# EAGLE board ME433 (EAGLE 8.7.1)
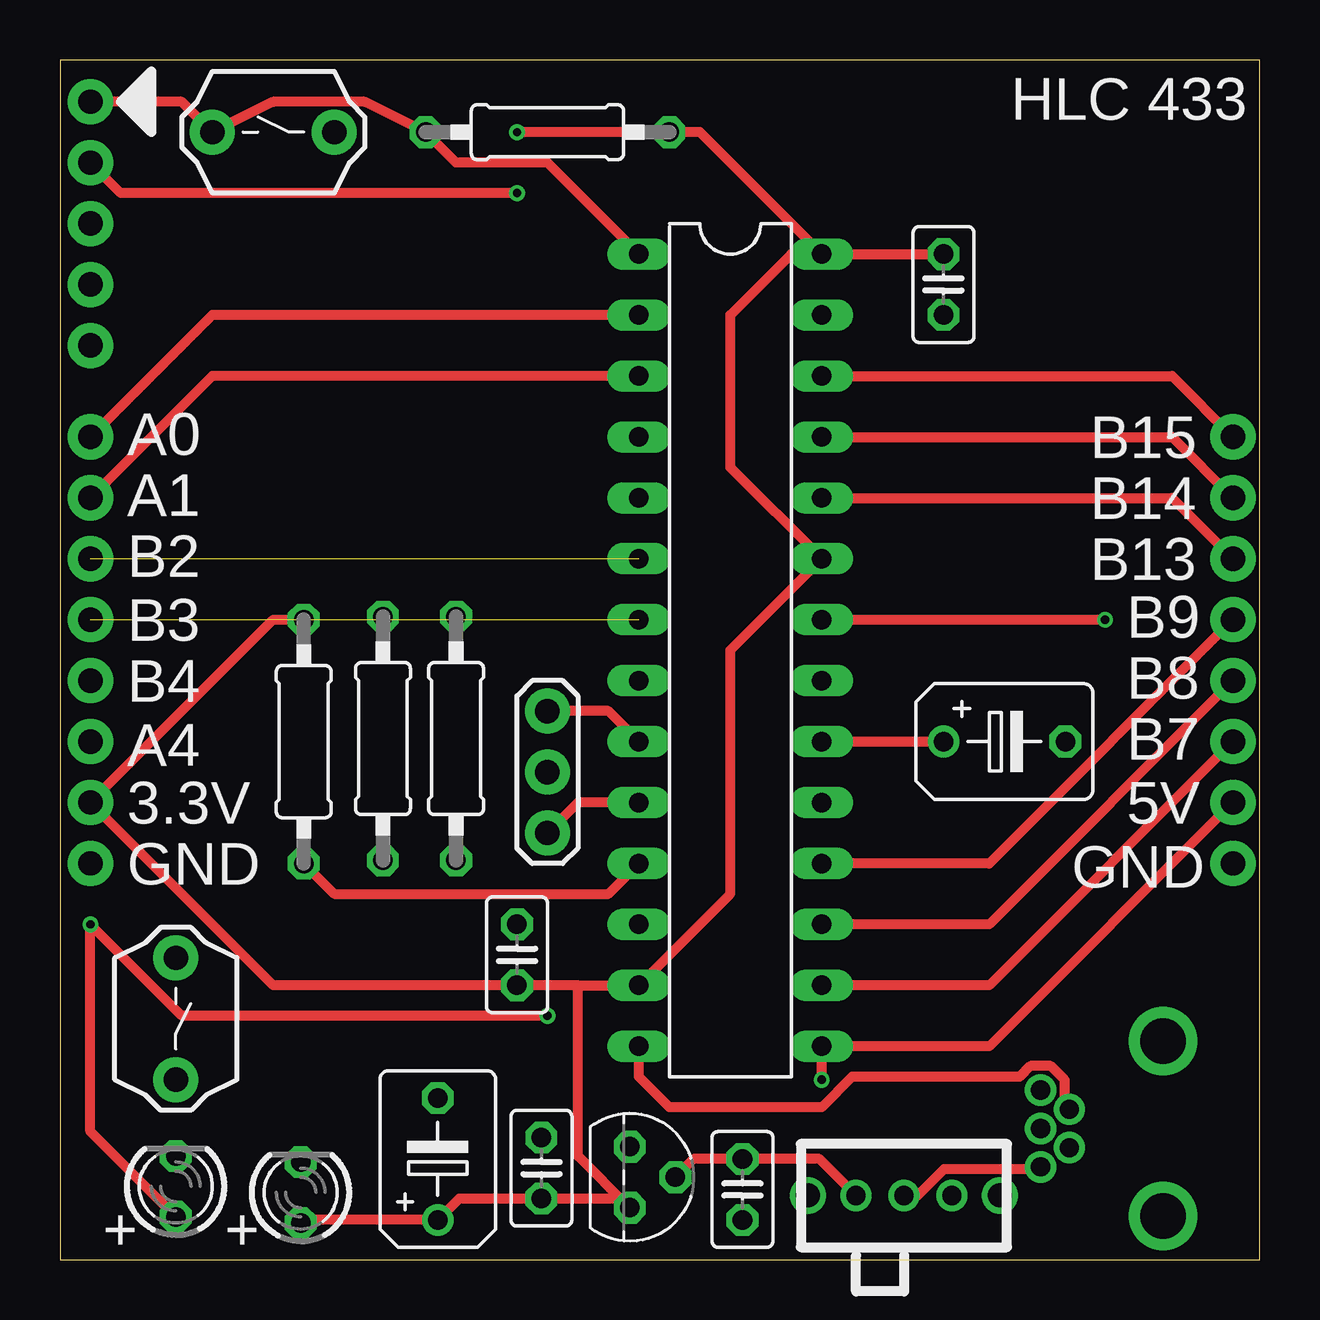
[diagram p0: board, top side]
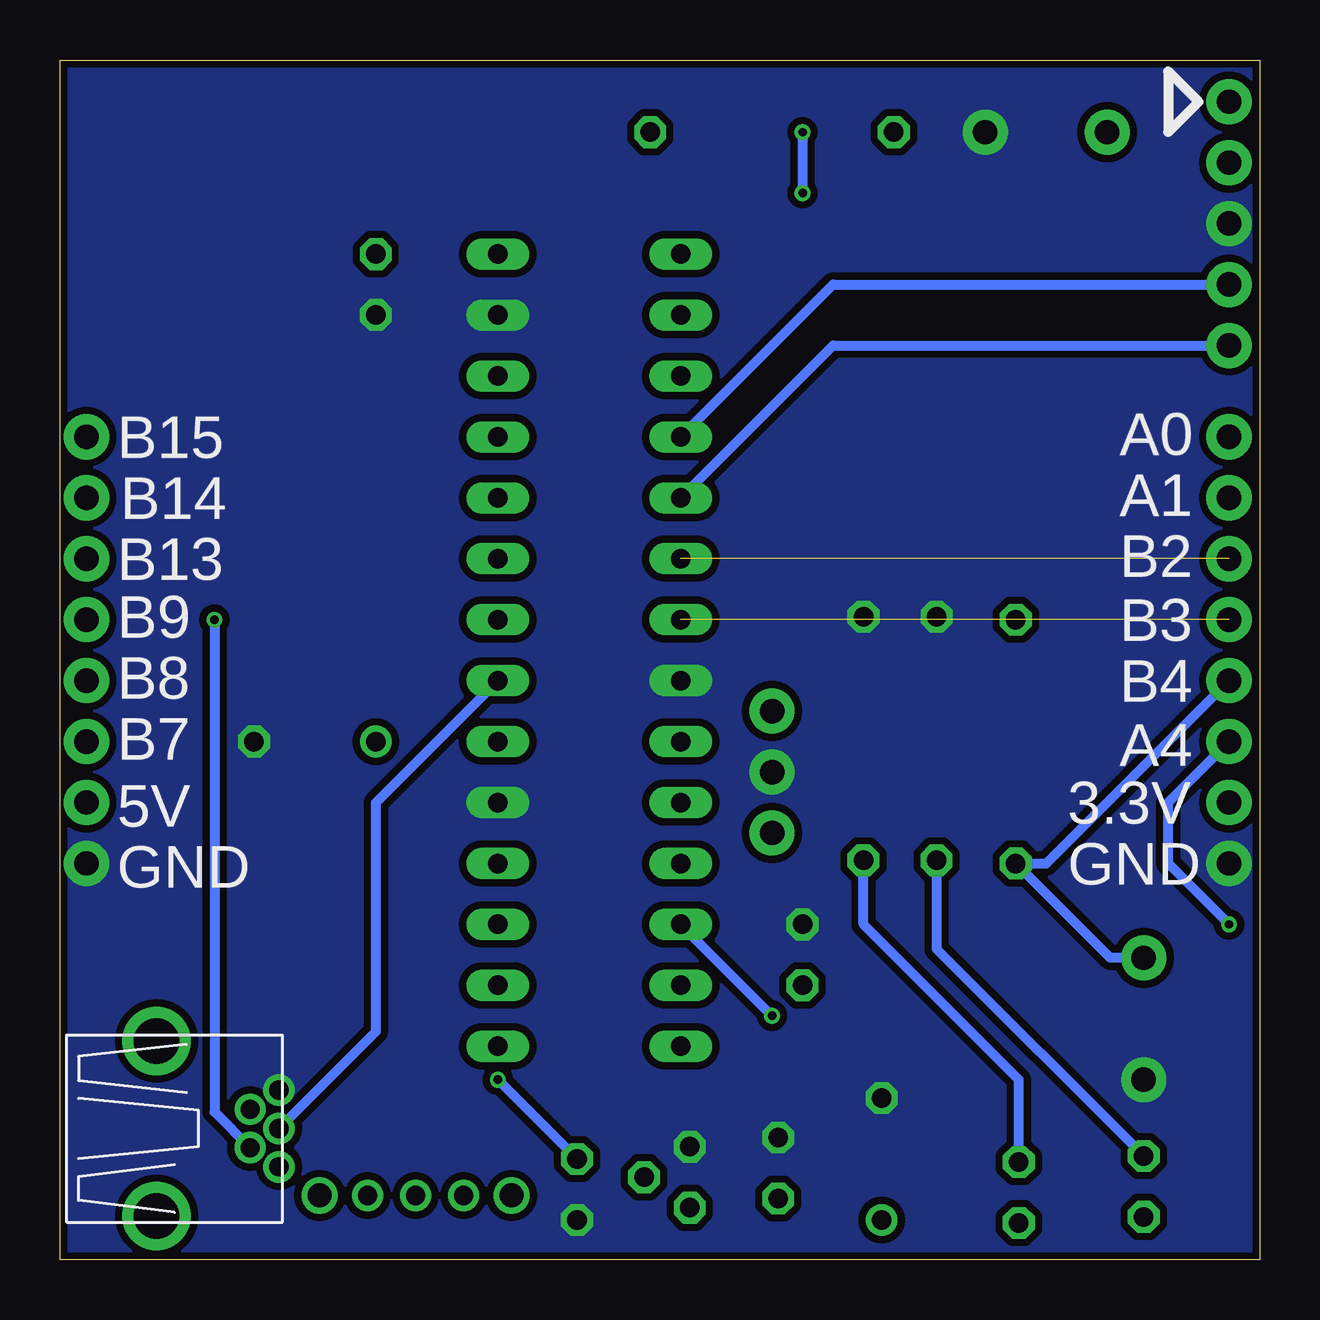
[diagram p1: board, bottom side, seen from below]

Size 50 x 50 mm. Coordinates in mm from the lower left corner, seen from the top.
Outline: 0,0 50,0 50,50 0,50 0,0
Copper layers (1*16): Top 0.035mm / dielectric 1.5mm / Bottom 0.035mm
Design rules "SeeedStudio_2layer_DRU_no_angle_20140221": minimum track width 6mil, minimum drill 12mil, track to track 6mil, track to pad 6mil, pad to pad 6mil, via to via 6mil, smd to smd 0mil, copper to edge 10mil, drill to drill 10mil, minimum pad ring 10mil, minimum via ring 6mil, stop-mask expansion 2mil, vias tented up to drill 100mil, thermal gap 10mil

## Footprints (pad centres in the part's own frame; a part is rotated, then mirrored left to right if it is on the bottom)
C025-025X050 = drill 0.813 octagon: 1 -1.27,0; 2 1.27,0
B45181B = drill 0.813: + -2.54,0 | drill 0.813 octagon: - 2.54,0
USB-MB-H = drill 0.8: D+ 5.1,0; D- 3.9,0.8; GND 5.1,-1.6; ID 3.9,-0.8; VBUS 5.1,1.6 | drill 1.9: P$6 0,-3.65; P$7 0,3.65
LED3MM = drill 0.813 octagon: A -1.27,0; K 1.27,0
0207/10 = drill 0.813 octagon: 1 -5.08,0; 2 5.08,0
DIL28-3 = drill 0.813 long: 1 -16.51,-3.81; 2 -13.97,-3.81; 3 -11.43,-3.81; 4 -8.89,-3.81; 5 -6.35,-3.81; 6 -3.81,-3.81; 7 -1.27,-3.81; 8 1.27,-3.81; 9 3.81,-3.81; 10 6.35,-3.81; 11 8.89,-3.81; 12 11.43,-3.81; 13 13.97,-3.81; 14 16.51,-3.81; 15 16.51,3.81; 16 13.97,3.81; 17 11.43,3.81; 18 8.89,3.81; 19 6.35,3.81; 20 3.81,3.81; 21 1.27,3.81; 22 -1.27,3.81; 23 -3.81,3.81; 24 -6.35,3.81; 25 -8.89,3.81; 26 -11.43,3.81; 27 -13.97,3.81; 28 -16.51,3.81
SLIDE = drill 0.8: 1 -2,0; 2 0,0; 3 2,0 | drill 1: P$1 -4,0; P$2 4,0
TO92 = drill 0.813 octagon: 1 -1.27,0; 2 0,1.905; 3 1.27,0
PB = drill 1.016 pad 1.88: 1 -2.54,0; 2 2.54,0
1X08 = drill 1.016 pad 1.88: 1 0,0; 2 2.54,0; 3 5.08,0; 4 7.62,0; 5 10.16,0; 6 12.7,0; 7 15.24,0; 8 17.78,0
1X05 = drill 1.016 pad 1.88: 1 0,0; 2 2.54,0; 3 5.08,0; 4 7.62,0; 5 10.16,0
OSC = drill 1.016 pad 1.88: 1 -2.54,0; 2 0,0; 3 2.54,0

## Placement (x,y rotation side)
C1  0.1uF  [C025-025X050]  36.83,40.64 270 top
C2  0.1uF  [C025-025X050]  19.05,12.7 90 top
C3  0.1uF  [C025-025X050]  28.45,2.92 270 top
C6  0.1uF  [C025-025X050]  20.07,3.81 90 top
C7  10uF  [B45181B]  39.37,21.59 0 top
C8  10uF  [B45181B]  15.75,4.19 90 top
J1  USB-MB-H  [USB-MB-H]  45.97,5.46 180 top
LED1  Red  [LED3MM]  10.03,2.79 90 top
LED2  Green  [LED3MM]  4.83,3.05 90 top
R1  330  [0207/10]  16.51,21.72 270 top
R2  330  [0207/10]  13.46,21.72 270 top
R3  10k  [0207/10]  20.32,46.99 180 top
R4  10k  [0207/10]  10.16,21.59 270 top
U$1  PIC32MX250F128B  [DIL28-3]  27.94,25.4 270 top
U$2  SLIDE  [SLIDE]  35.18,2.67 180 top
U$3  MCP1702  [TO92]  23.75,3.43 270 top
U$4  RESET  [PB]  8.89,46.99 0 top
U$5  USER  [PB]  4.83,10.03 270 top
U$6  CONN_08  [1X08]  48.9,16.51 90 top
U$7  CONN_08  [1X08]  1.27,16.51 90 top
U$8  PICKIT3  [1X05]  1.27,48.26 270 top
U$9  8MHz  [OSC]  20.32,20.32 270 top

## Library data of the parts
C1-C3 C6 R1-R4 = resistor
C7 C8 J1 U$1-U$9 = HW2
LED1 LED2 = led

## Nets
+3V3: C1.1 C2.1 C6.1 C8.+ LED1.A R3.1 R4.1 U$1.13 U$1.23 U$1.28 U$3.3 U$7.2 U$8.2
+5V: C3.1 U$1.15 U$2.3 U$3.2 U$6.2
A0: U$1.2 U$7.8
A1: U$1.3 U$7.7
A4/LED: LED2.A U$1.12 U$7.3
B2: U$1.6 U$7.6
B3: U$1.7 U$7.5
B4/USER: R4.2 U$1.11 U$5.1 U$7.4
B7: U$1.16 U$6.3
B8: U$1.17 U$6.4
B9: U$1.18 U$6.5
B13: U$1.24 U$6.6
B14: U$1.25 U$6.7
B15: U$1.26 U$6.8
D+: J1.D+ U$1.21
D-: J1.D- U$1.22
GND: C1.2 C2.2 C3.2 C6.2 C7.- C8.- J1.GND R1.1 R2.1 U$1.8 U$1.19 U$1.27 U$3.1 U$4.2 U$5.2 U$6.1 U$7.1 U$8.3 U$9.2
MCLR: R3.2 U$1.1 U$4.1 U$8.1
N$1: J1.VBUS U$2.2
N$2: U$1.9 U$9.1
N$3: U$1.10 U$9.3
N$4: LED1.K R1.2
N$5: C7.+ U$1.20
N$7: LED2.K R2.2
PGC: U$1.5 U$8.5
PGD: U$1.4 U$8.4
USBID: J1.ID U$1.14

## Tracks (layer width: path | path; a pad name or v marks a point on that pad's centre or on a via)
+3V3  (via drill 0.35)
  Top 0.406: LED1.A 10.16,1.65 C8.+ 16.64,2.54 C6.1 23.37,2.54 U$3.3 21.59,4.32 21.59,11.43 | 21.59,11.43 U$1.13 27.94,15.24 27.94,25.4 U$1.23 27.94,33.02 27.94,39.37 30.48,41.91 U$1.28 | 21.59,11.43 C2.1 8.89,11.43 U$7.2 8.89,26.67 R4.1 | U$1.28 C1.1 | U$1.28 26.67,46.99 R3.1 v19.05,46.99 | U$8.2 2.54,44.45 v19.05,44.45
  Bottom 0.406: v19.05,46.99 v19.05,44.45
+5V  (via drill 0.35)
  Top 0.406: U$2.3 31.66,4.19 C3.1 26.42,4.19 U$3.2 | v31.75,7.49 U$1.15 38.73,8.89 U$6.2
  Bottom 0.406: C3.1 v31.75,7.49
A0
  Top 0.406: U$1.2 6.35,39.37 U$7.8
A1
  Top 0.406: U$1.3 6.35,36.83 U$7.7
A4/LED  (via drill 0.35)
  Top 0.406: LED2.A 1.27,5.33 v1.27,13.97 5.08,10.16 v20.32,10.16
  Bottom 0.406: v1.27,13.97 3.81,16.51 3.81,19.05 U$7.3 | U$1.12 v20.32,10.16
B2  (1 unrouted)
B3  (1 unrouted)
B4/USER
  Top 0.406: R4.2 11.43,15.24 22.86,15.24 U$1.11
  Bottom 0.406: U$7.4 8.89,16.51 R4.2 6.22,12.57 U$5.1
B7
  Top 0.406: U$6.3 38.73,11.43 U$1.16
B8
  Top 0.406: U$6.4 38.73,13.97 U$1.17
B9
  Top 0.406: U$6.5 38.73,16.51 U$1.18
B13
  Top 0.406: U$1.24 46.35,31.75 U$6.6
B14
  Top 0.406: U$1.25 46.35,34.29 U$6.7
B15
  Top 0.406: U$1.26 46.35,36.83 U$6.8
D+
  Bottom 0.406: U$1.21 36.83,19.05 36.83,9.51 J1.D+
D-  (via drill 0.35)
  Top 0.406: U$1.22 v43.56,26.67 43.69,26.67
  Bottom 0.406: v43.56,26.67 43.56,6.15 J1.D-
GND
  pour Bottom (isolate 0.305, no thermals): 0,50.04 50.04,50.04 50.04,0.51 49.53,0 0,0 0,49.53
MCLR
  Top 0.406: U$1.1 20.32,45.72 16.51,45.72 R3.2 12.7,48.26 8.89,48.26 U$4.1 5.08,48.26 U$8.1
N$1
  Top 0.406: U$2.2 35.75,2.67 36.86,3.78 40.79,3.78 J1.VBUS
N$2
  Top 0.406: U$1.9 22.86,22.86 U$9.1
N$3
  Top 0.406: U$1.10 21.59,19.05 U$9.3
N$4
  Bottom 0.406: LED1.K 10.03,7.49 16.51,13.97 R1.2
N$5
  Top 0.406: U$1.20 C7.+
N$7
  Bottom 0.406: R2.2 13.46,12.95 LED2.K
PGC
  Bottom 0.406: U$1.5 17.78,38.1 U$8.5
PGD
  Bottom 0.406: U$1.4 17.78,40.64 U$8.4
USBID
  Top 0.406: J1.ID 41.88,6.45 41.88,7.48 41.29,8.07 40.46,8.07 40.01,7.62 33.02,7.62 31.75,6.35 25.4,6.35 24.13,7.62 U$1.14

## Text on the board
tPlace: HLC 433 | A0 | B15 | A1 | B14 | B2 | B13 | B3 | B9 | B4 | B8 | A4 | B7 | 3.3V | 5V | GND | GND | + | +
bPlace: A0 | B15 | A1 | B14 | B2 | B13 | B3 | B9 | B4 | B8 | A4 | B7 | 3.3V | 5V | GND | GND